# Altium PCB Calculator.PcbDoc
Units mm, origin at the board's own origin, x right, y up, seen from the top; angles counter-clockwise.
Board outline 115.32 x 59.44 mm, 2 copper layers (Top Layer, Bottom Layer); 53 components, 66 nets, 313 pads, 27 vias.
Unrouted connection lines stored in the file: 34.
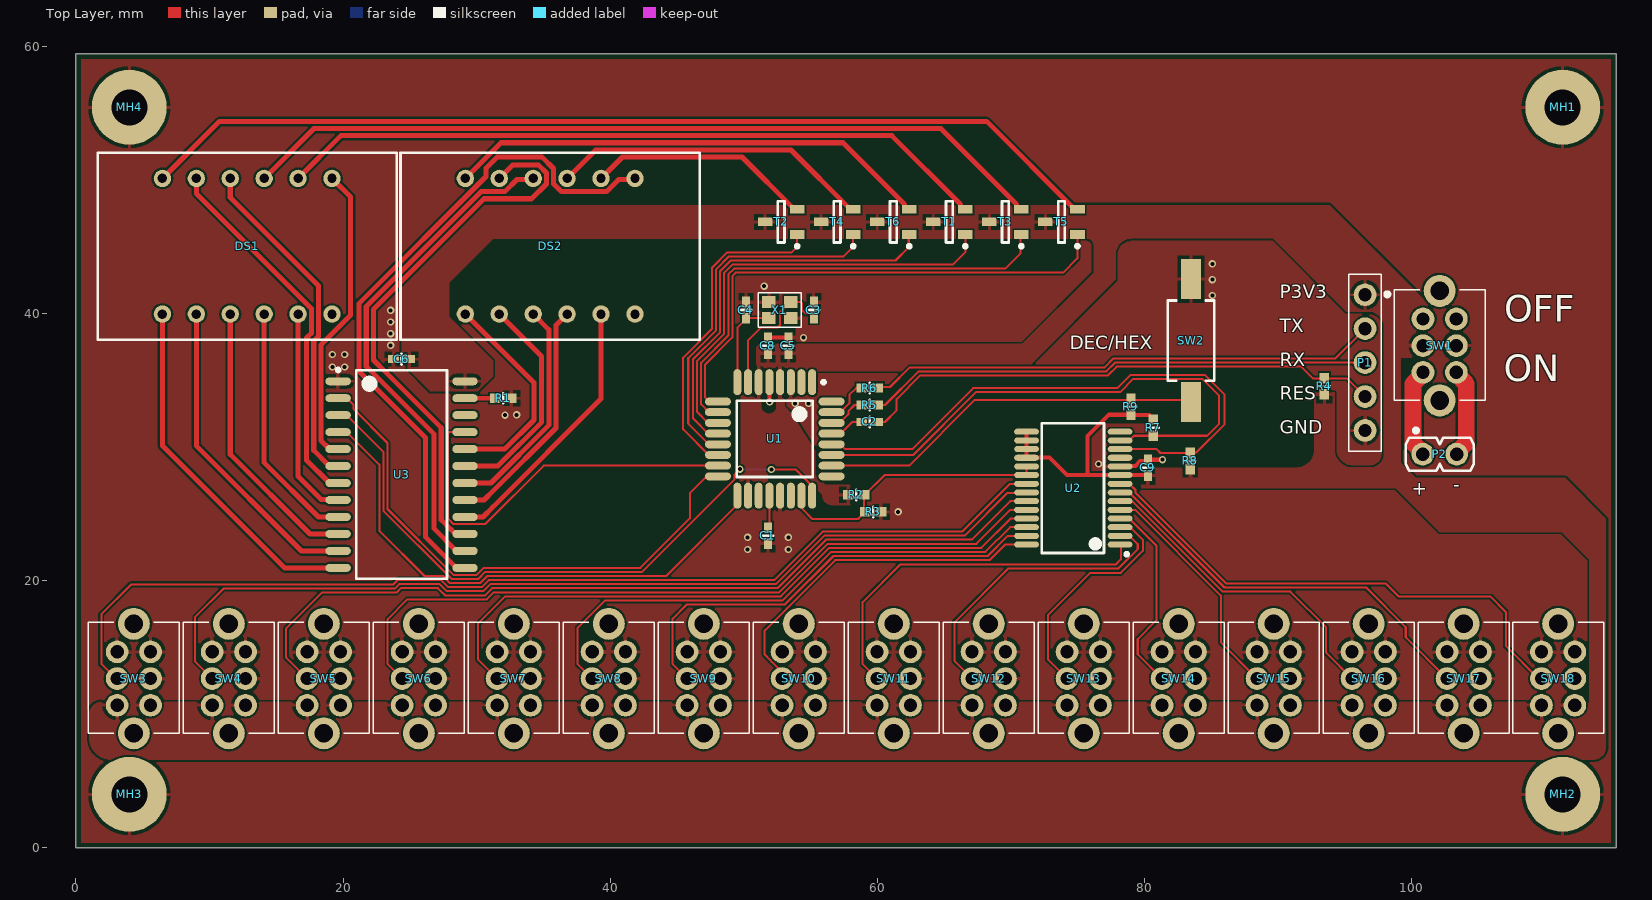
[diagram p0: Top Layer view]
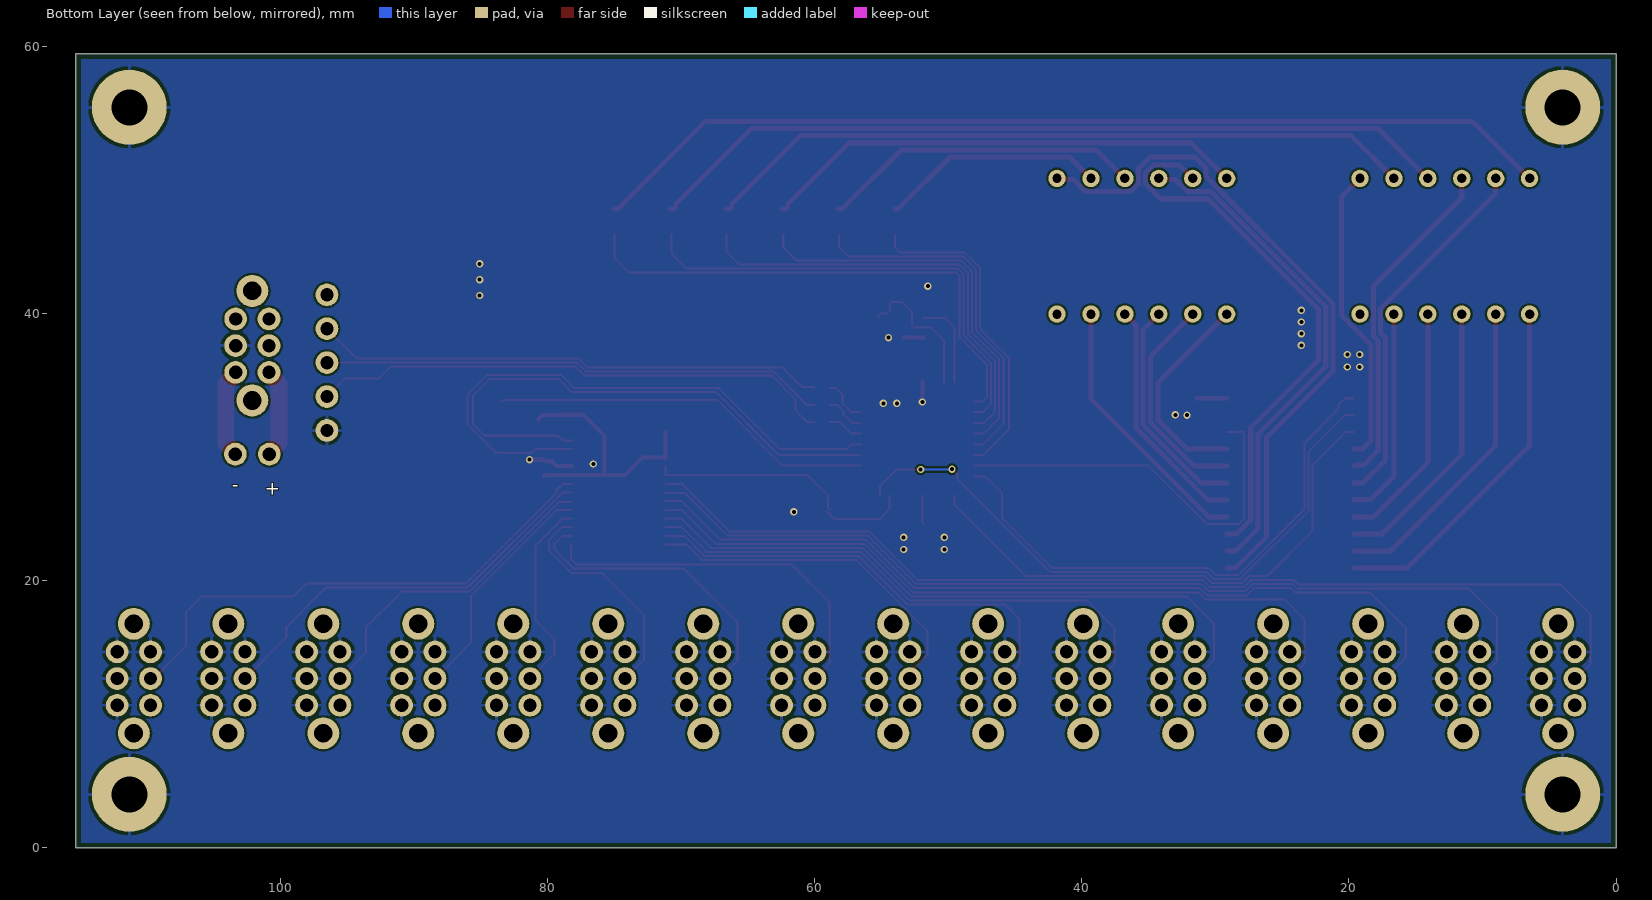
[diagram p1: Bottom Layer view, seen from below]
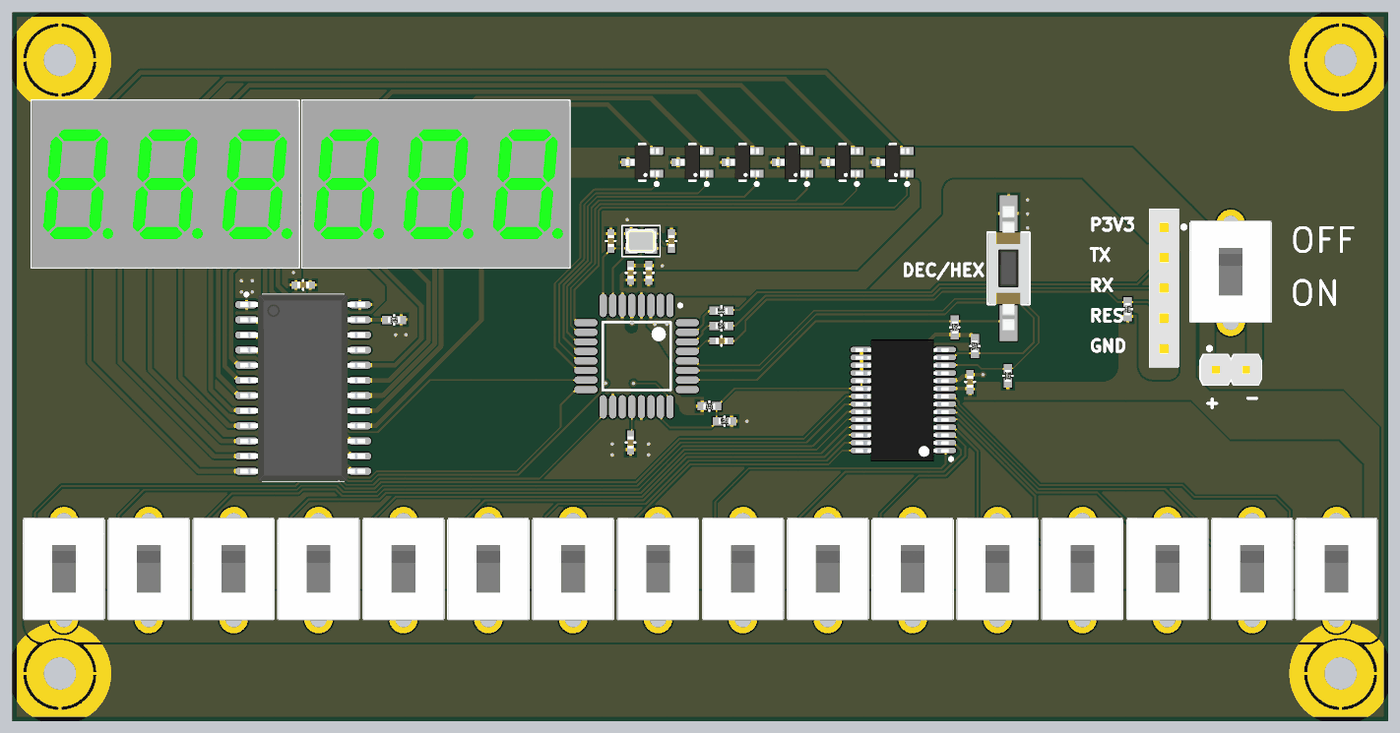
[diagram p2: 3D render of the assembled board from above, using the file's embedded part models]

## Layer stack, top to bottom
Top Solder: solder mask 0.0102, Solder Resist, Dk 3.5
Top Layer: signal copper 0.0356
Dielectric 1: dielectric 0.32, FR-4, Dk 4.8
Bottom Layer: signal copper 0.0356
Bottom Solder: solder mask 0.0102, Solder Resist, Dk 3.5

## Board outline
0,0 0,59.436 115.316,59.436 115.316,0

## Design rules (kind name [scope] priority, off if disabled: settings)
BoardOutlineClearance [All] p1: gap=0.381 ignorepadtopadclearanceinfootprint=FALSE
Clearance [All] p1: gap=0.152 ignorepadtopadclearanceinfootprint=FALSE except(0: Arc-Hole Track-Hole SMDPad-Hole THPad-Hole Via-Hole Fill-Hole Poly-Hole Region-Hole Text-Hole)
HoleSize [All] p1: absolutevalues=TRUE maxlimit=3.048 minlimit=0.025 maxpercent=80.000 minpercent=20.000
HoleToHoleClearance [All] p1: gap=0.254 allowstackedmicrovias=FALSE
MinimumSolderMaskSliver [All] p1: minsoldermaskwidth=0.152
PlaneConnect [All] p1: pad.planeconnectstyle=Relief pad.reliefexpansion=0.508 pad.reliefentries=4 pad.reliefconductorwidth=0.254 pad.reliefairgap=0.254 via.planeconnectstyle=Direct via.reliefexpansion=0.508 via.reliefentries=4 via.reliefconductorwidth=0.254 via.reliefairgap=0.254
PolygonConnect [All] p1: thpad.connectstyle=Relief thpad.reliefconductorwidth=0.254 thpad.reliefentries=4 thpad.polygonreliefangle="90 Angle" thpad.airgapwidth=0.254 smdpad.connectstyle=Relief smdpad.reliefconductorwidth=0.254 smdpad.reliefentries=4 smdpad.polygonreliefangle="90 Angle" smdpad.airgapwidth=0.254 via.connectstyle=Direct via.reliefconductorwidth=0.254 via.reliefentries=4 via.polygonreliefangle="90 Angle" via.airgapwidth=0.254
RoutingVias [All] p1: holewidth=0.3 width=0.55 viastyle="Through Hole" minholewidth=0.3 minwidth=0.55 maxholewidth=0.3 maxwidth=0.55
SilkToSilkClearance [All] p1: silktosilkclearance=0.102
SilkToSolderMaskClearance [IsPad] p1: minsilkscreentomaskgap=0.152 clearancetoexposedcopper=TRUE
SolderMaskExpansion [All] p1: expansion=0.102
UnRoutedNet [All] p1: checkbadconnections=TRUE
Width [All] p1: maxlimit=1.27 minlimit=0.152 preferedwidth=0.305 minimp=50.000000 maximp=50.000000 favimp=50.000000
23 further rules are at their usual default settings.

## Classes and differential pairs
component class uC: C1 C2 C3 C4 C5 C8 C9 R2 R3 R4 R5 R6 R7 R8 R9 U1 U2 X1
component class LEDs: C6 DS1 DS2 R1 T1 T2 T3 T4 T5 T6 U3
component class Connectors_and_mechanical: MH1 MH2 MH3 MH4 P1 P2 SW1 SW2 SW3 SW4 SW5 SW6 SW7 SW8 SW9 SW10 SW11 SW12 SW13 SW14 SW15 SW16 SW17 SW18

## Components (designator, comment, footprint, x,y, rotation, side; value= is the part's Value field where it differs from the comment)
C1 "100nF" CAPC0402X60N 51.816,23.368 r90 top
C2 "100nF" CAPC0402X60N 59.436,31.877 r0 top
C3 "12pF" CAPC0402X60N 55.245,40.259 r90 top
C4 "12pF" CAPC0402X60N 50.165,40.259 r270 top
C5 "100nF" CAPC0402X60N 53.34,37.592 r270 top
C6 "100nF" CAPC0402X60N 24.384,36.576 r0 top
C8 "100nF" CAPC0402X60N 51.816,37.592 r270 top
C9 "100nF" CAPC0402X60N 80.264,28.448 r270 top
DS1 "=Device" 7seg_3digits 6.477,39.954 r0 top locked
DS2 "=Device" 7seg_3digits 29.159,39.954 r0 top locked
MH1 "M2.5" MH-M2.5_COPPER 111.316,55.436 r0 top locked
MH2 "M2.5" MH-M2.5_COPPER 111.316,4 r0 top locked
MH3 "M2.5" MH-M2.5_COPPER 4,4 r0 top locked
MH4 "M2.5" MH-M2.5_COPPER 4,55.436 r0 top
P1 "SSW-105-02-G-S" SAMTEC_SSW-105-02-G-S 96.52,37.592 r270 top
P2 "MTLW-102-07-G-S-250" SAMTEC_MTLW-102-07-G-S-250 100.838,29.464 r0 top
R1 "3.48k" RESC0402X40N 32.004,33.655 r180 top
R2 "1k" RESC0402X40N 58.42,26.416 r180 top
R3 "1k" RESC0402X40N 59.69,25.146 r0 top
R4 "1k" RESC0402X40N 93.472,34.544 r270 top
R5 "1k" RESC0402X40N 59.436,33.147 r0 top
R6 "1k" RESC0402X40N 59.436,34.417 r0 top
R7 "1k" RESC0402X40N 80.67,31.445 r90 top
R8 "1k" RESC0402X40N 83.439,28.956 r270 top
R9 "1k" RESC0402X40N 78.994,33.02 r270 top
SW1 "SS008B" SS008B-02P-22 102.108,37.592 r0 top
SW2 "PTS636" PTS636_SMT_G 83.49,37.973 r270 top
SW3 "SS008B" SS008B-02P-22 4.338,12.668 r0 top
SW4 "SS008B" SS008B-02P-22 11.45,12.668 r0 top
SW5 "SS008B" SS008B-02P-22 18.562,12.668 r0 top
SW6 "SS008B" SS008B-02P-22 25.674,12.668 r0 top
SW7 "SS008B" SS008B-02P-22 32.786,12.668 r0 top
SW8 "SS008B" SS008B-02P-22 39.898,12.668 r0 top
SW9 "SS008B" SS008B-02P-22 47.01,12.668 r0 top
SW10 "SS008B" SS008B-02P-22 54.122,12.668 r0 top
SW11 "SS008B" SS008B-02P-22 61.234,12.668 r0 top
SW12 "SS008B" SS008B-02P-22 68.346,12.668 r0 top
SW13 "SS008B" SS008B-02P-22 75.458,12.668 r0 top
SW14 "SS008B" SS008B-02P-22 82.57,12.668 r0 top
SW15 "SS008B" SS008B-02P-22 89.682,12.668 r0 top
SW16 "SS008B" SS008B-02P-22 96.794,12.668 r0 top
SW17 "SS008B" SS008B-02P-22 103.906,12.668 r0 top
SW18 "SS008B" SS008B-02P-22 110.978,12.668 r0 top
T1 "BC847C" SOT23-3 65.393,46.863 r180 top
T2 "BC847C" SOT23-3 52.802,46.863 r180 top
T3 "BC847C" SOT23-3 69.59,46.863 r180 top
T4 "BC847C" SOT23-3 56.999,46.863 r180 top
T5 "BC847C" SOT23-3 73.787,46.863 r180 top
T6 "BC847C" SOT23-3 61.196,46.863 r180 top
U1 "ATmega328P-15AZ" 32MA_M 52.324,30.607 r270 top
U2 "MCP23017" SSOP28 74.676,26.924 r180 top
U3 "=Device" SOP-24_N 24.384,27.94 r0 top
X1 "16 MHz" LFXTAL069392CUTT 52.705,40.259 r180 top

## Footprints (in the part's own frame and the unit in brackets; to place one, negate y for a bottom-side part, rotate by r counter-clockwise, add the part's x,y. Pads: shape width x height; smd on the part's side, far side on the other; paste and mask are expansions set on the pad)
7seg_3digits [mm] "7seg 3 digits LED Display, 12 Pin Body 22.5x14mm"
  round 1.3 hole 0.7: 1(0,0) 2(2.54,0) 3(5.08,0) 4(7.62,0) 5(10.16,0) 6(12.7,0) 7(12.7,10.16) 8(10.16,10.16) 9(7.62,10.16) 10(5.08,10.16) 11(2.54,10.16) 12(0,10.16)
  silkscreen extent -4.85,-1.92 17.55,12.08, body extent -4.85,-1.92 17.55,12.08, height 7.1
32MA_M [mm] "Thin QFP, 32-Leads, Body 7x7mm, Pitch 0.8mm, IPC Low Density"
  oval 1.95x0.6 smd: 1(-4.25,2.8) 2(-4.25,2) 3(-4.25,1.2) 4(-4.25,0.4) 5(-4.25,-0.4) 6(-4.25,-1.2) 7(-4.25,-2) 8(-4.25,-2.8) 17(4.25,-2.8) 18(4.25,-2) 19(4.25,-1.2) 20(4.25,-0.4) 21(4.25,0.4) 22(4.25,1.2) 23(4.25,2) 24(4.25,2.8)
  oval 0.6x1.95 smd: 9(-2.8,-4.25) 10(-2,-4.25) 11(-1.2,-4.25) 12(-0.4,-4.25) 13(0.4,-4.25) 14(1.2,-4.25) 15(2,-4.25) 16(2.8,-4.25) 25(2.8,4.25) 26(2,4.25) 27(1.2,4.25) 28(0.4,4.25) 29(-0.4,4.25) 30(-1.2,4.25) 31(-2,4.25) 32(-2.8,4.25)
  silkscreen extent -4.37,-2.85 2.85,3.78, body extent -3.5,-3.5 3.5,3.5, height 1.2
CAPC0402X60N [mm] "Chip Capacitor, Body 1.0x0.5mm, IPC Medium Density"
  rect 0.8x0.6 smd: 1(-0.6,0) 2(0.6,0)
  silkscreen extent 0,-0.4 0,0.4, body extent -0.5,-0.25 0.5,0.25, height 0.6
LFXTAL069392CUTT [mm]
  rect 1x0.9 smd: 1(-0.825,-0.613) 2(0.825,-0.613) 3(0.825,0.613) 4(-0.825,0.613)
  silkscreen extent -1.6,-1.3 1.6,1.3, body extent -1.25,-1 1.25,1, height 0.8
MH-M2.5_COPPER [mm] "M2.5 screw Mounting Hole with copper without washer"
  round 5.6 hole 2.7 mask+1.5: MH(0,0)
PTS636_SMT_G [mm] "SMD TACT Switch, 2-Leads, Body 6x3.5mm, IPC Medium Density"
  rect 3x1.5 smd: 1(-4.6,0) 2(4.6,0)
  silkscreen extent -3,-1.75 3,1.75, body extent -5.2,-1.75 5.2,1.75, height 5
RESC0402X40N [mm] "Chip Resistor, Body 1.1x0.5mm, IPC Medium Density"
  rect 0.8x0.7 smd: 1(-0.6,0) 2(0.6,0)
  silkscreen extent 0,-0.38 0,0.38, body extent -0.5,-0.25 0.5,0.25, height 0.35
SAMTEC_MTLW-102-07-G-S-250 [mm] "4 Contacts - Pitch 2.54mm - Single Row Through Mount Straight Header (Post Lead = 6.35mm, Tail Lead 3.05mm, Insulator 1.52mm)"
  round 1.7 hole 1: 1(0,0) 2(2.54,0)
  silkscreen extent -1.27,-1.24 3.81,1.93, body extent -1.24,-1.24 3.84,1.24, height 7.87
SAMTEC_SSW-105-02-G-S [mm] "5 Contacts, Pitch 2.54mm - Top Entry, Single Row, Through Mount Straigh Socket"
  round 1.7 hole 1: 1(-3.81,0) 2(-1.27,0) 3(1.27,0) 4(3.81,0) 5(6.35,0)
  silkscreen extent -5.33,-1.21 7.9,1.82, body extent -5.33,-1.21 7.87,1.21, height 8.51
SOP-24_N [mm] "SOP, 24-Leads, Body 15,40x7,50mm, Pitch 1,27mm, IPC Medium Density"
  oval 1.9x0.6 smd: 1(-4.75,6.985) 2(-4.75,5.715) 3(-4.75,4.445) 4(-4.75,3.175) 5(-4.75,1.905) 6(-4.75,0.635) 7(-4.75,-0.635) 8(-4.75,-1.905) 9(-4.75,-3.175) 10(-4.75,-4.445) 11(-4.75,-5.715) 12(-4.75,-6.985) 13(4.75,-6.985) 14(4.75,-5.715) 15(4.75,-4.445) 16(4.75,-3.175) 17(4.75,-1.905) 18(4.75,-0.635) 19(4.75,0.635) 20(4.75,1.905) 21(4.75,3.175) 22(4.75,4.445) 23(4.75,5.715) 24(4.75,6.985)
  silkscreen extent -4.87,-7.8 3.4,7.96, body extent -5.27,-7.85 5.2,7.85, height 1.9
SOT23-3 [mm] "SOT, 3-Leads, Body 2.9x1.6mm, Pitch 0.95mm, IPC Medium Density"
  rect 1.1x0.65 smd: 1(-1.2,0.95) 2(-1.2,-0.95) 3(1.2,0)
  silkscreen extent -1.33,-1.55 0.25,1.95, body extent -1.4,-1.45 1.4,1.45, height 1.3
SS008B-02P-22 [mm] "2 position; DPDT; 0,3A/30VDC; ON-ON; 50m?"
  round 1.7 hole 1: 1(-1.25,-2) 2(-1.25,0) 3(-1.25,2) 4(1.25,-2) 5(1.25,0) 6(1.25,2)
  round 2.4 hole 1.4: ""(0,-4.1) ""(0,4.1)
  silkscreen extent -3.4,-4.1 3.4,4.2, body extent -3.4,-4.2 3.4,4.4, height 9
SSOP28 [mm] "SSOP, 28-Leads, Body 10.2x7.8mm, Pitch 0.65mm, IPC Medium Density"
  oval 1.85x0.45 smd: 1(-3.5,4.225) 2(-3.5,3.575) 3(-3.5,2.925) 4(-3.5,2.275) 5(-3.5,1.625) 6(-3.5,0.975) 7(-3.5,0.325) 8(-3.5,-0.325) 9(-3.5,-0.975) 10(-3.5,-1.625) 11(-3.5,-2.275) 12(-3.5,-2.925) 13(-3.5,-3.575) 14(-3.5,-4.225) 15(3.5,-4.225) 16(3.5,-3.575) 17(3.5,-2.925) 18(3.5,-2.275) 19(3.5,-1.625) 20(3.5,-0.975) 21(3.5,-0.325) 22(3.5,0.325) 23(3.5,0.975) 24(3.5,1.625) 25(3.5,2.275) 26(3.5,2.925) 27(3.5,3.575) 28(3.5,4.225)
  silkscreen extent -4.13,-4.85 2.35,5.07, body extent -3.81,-5.07 3.99,5.13, height 2.06

## Part data
C1 C2 C5 C6 C8 C9: library part CC0402_100NF_16V_10%_X7R, "Non-polarised capacitor", Case="0402 (1005 metric)", Dielectric=X7R, Manufacturer=GENERIC, Manufacturer 1 Component Height=0.5mm, Manufacturer 1 Example=Samsung, Manufacturer 1 Part Number=CL05B104KO5NNNC, Tolerance=10%, Voltage=16V, Author=KB, Create Date=29.07.2019, DesignItemId=CC0402_100NF_16V_10%_X7R, HelpURL=http://www.farnell.com/datasheets/1870456.pdf?_ga=2.66904750.1666480506.1564307475-778048469.1556931874&_gac=1.242951606.1563147047.EAIaIQobChMIrfuAvMi14wIVB-J3Ch1XegfpEAYYASABEgIMVfD_BwE, LatestRevisionDate=29.07.2019, Manufacturer Part Number=CC0402_100NF_16V_10%_X7R, Mounted=Yes, Part Description="Non-polarised capacitor", Pin Count=2, PressFit=No, Sense=No, SMD=Yes, Socket=No, Status=Recommended, Supplier 1=TME, Supplier 2=Farnell, Supplier 3=Mouser, Supplier Part Number 1=CL05B104KO5NNNC, Supplier Part Number 2=1758896, Supplier Part Number 3=710-885012205037
C3 C4: library part CC0402_12PF_50V_5%_C0G, "Non-polarised capacitor", Case="0402 (1005 metric)", Dielectric=C0G, Manufacturer=GENERIC, Manufacturer 1 Component Height=0.5mm, Manufacturer 1 Example=Murata, Manufacturer 1 Part Number=GRM1555C1H120JA01D, Tolerance=5%, Voltage=50V, Author=KB, Create Date=28.07.2019, DesignItemId=CC0402_12PF_50V_5%_C0G, HelpURL=https://search.murata.co.jp/Ceramy/image/img/A01X/G101/ENG/GJM1555C1H7R5CB01-01.pdf, LatestRevisionDate=28.07.2019, Manufacturer Part Number=CC0402_12PF_50V_5%_C0G, Mounted=Yes, Part Description="Non-polarised capacitor", Pin Count=2, PressFit=No, Sense=No, SMD=Yes, Socket=No, Status=Recommended, Supplier 1=TME, Supplier 2=Farnell, Supplier 3=Mouser, Supplier Part Number 1=GRM1555C1H120JA01D, Supplier Part Number 2=1758943, Supplier Part Number 3=81-GCM1555C1H120JA6J
DS1 DS2: library part "7-Segment Green Display CA 3-Digits", "7-seg LED Display; 9.14mm; 0.36”; 3 Digits; Green", Color=Green, Manufacturer=Generic, Manufacturer 1 Component Height=7.2mm, Manufacturer 1 Example=WENRUN, Manufacturer 1 Part Number=LTD036BAG-101A-02, Supplier Part Number 1=LTD036BAG-101A, Author=JK, Create Date=04.12.2019, DesignItemId="7-Segment Green Display CA 3-Digits", HelpURL=https://www.tme.eu/Document/a6075032405c075918ac13897b6973d4/LTD036BAG-101A.pdf, LatestRevisionDate=04.12.2019, Mounted=YES, Part Description="7-seg LED Display; 9.14mm; 0.36”; 3 Digits; Green", Pin Count=12, PressFit=No, Sense=No, SMD=No, Socket=No, Supplier 1=TME
MH1 MH2 MH3 MH4: library part MH-M2.5_C, "Mounting hole, M2.5, exposed pad", Author=KB, Create Date=19.05.2011, DesignItemId=MH-M2.5_C, Family=M2.5, LatestRevisionDate=19.05.2011, Part Description="Mounting hole, M2.5, exposed pad"
P1: library part HDR_THT_5X1V_F_2P54MM, "General Purpose Header: THT, 2.54mm, Female, Straight, Long Lead", Current Max=3A, Manufacturer=GENERIC, Manufacturer 1 Component Height=11.55mm, Manufacturer 1 Example=Samtec, Supplier Part Number 1=ZL262-5SG, Author=UN, Create Date=19.08.2014, DesignItemId=HDR_THT_5X1V_F_2P54MM, Family=SSW, HelpURL=https://pl.mouser.com/datasheet/2/527/ssw_th-1507658.pdf, LatestRevisionDate=19.08.2014, Manufacturer 1 Part Number=SSW-105-02-G-S, Manufacturer Part Number=HDR_THT_5X1V_F_2P54MM, Mounted=Yes, Part Description="General Purpose Header: THT, 2.54mm, Female, Straight, Long Lead", Pin Count=5, PressFit=No, Sense=No, SMD=No, Socket=No, Status=Recommended, Supplier 1=TME, Supplier 2=Mouser
P2: library part HDR_THT_2X1V_M_2P54MM, "General Purpose Header: THT, 2.54mm, Male, Straight", Current Max=5.2A, Manufacturer=GENERIC, Manufacturer 1 Component Height=10.92mm, Manufacturer 1 Example=Samtec, Supplier Part Number 1=200-MTLW10207GS250, Author=PC, Create Date=19.08.2013, DesignItemId=HDR_THT_2X1V_M_2P54MM, Family=MLTW, HelpURL=https://pl.mouser.com/datasheet/2/527/mtlw_th-1370324.pdf, LatestRevisionDate=19.08.2013, Manufacturer 1 Part Number=MTLW-102-07-G-S-250, Manufacturer Part Number=HDR_THT_2X1V_M_2P54MM, Mounted=Yes, Part Description="General Purpose Header: THT, 2.54mm, Male, Straight", Pin Count=2, PressFit=No, Sense=No, SMD=No, Socket=No, Status=Recommended, Supplier 1=Mouser, Supplier 2=Digi-Key, Supplier 3="Sager Electronics / Sager Electronics"
R1: library part R0402_3K48_0.0625W_100PPM, "General Purpose Thick Film Chip Resistor", Case="0402 (1005 metric)", Current Max=0, Manufacturer=GENERIC, Manufacturer 1 Component Height=0.4mm, Manufacturer 1 Example=Vishay, Manufacturer 1 Part Number=CRCW04023K48FKEDC, Manufacturer Part Number="R0402_3K48_0.0625W 0.1W 0.125W 0.25W 0.5W 1W 0.75W 1W_100PPM", Power=62.5mW, Tolerance=1%, Voltage=50V, Author=KB, Component Type=Standard, Create Date=03.07.2019, DesignItemId=R0402_3K48_0.0625W_100PPM, HelpURL=https://www.vishay.com/docs/20035/dcrcwe3.pdf, LatestRevisionDate=03.07.2019, Mounted=Yes, Part Description="General Purpose Thick Film Chip Resistor", Pin Count=2, PressFit=No, Sense=No, SMD=Yes, Socket=No, Status=Recommended, Supplier 1=Farnell, Supplier 2=TME, Supplier 3=Mouser, TC="±100 ppm/°C"
R2 R3 R4 R5 R6 R7 R8 R9: library part R0402_1K00_0.0625W_100PPM, "General Purpose Thick Film Chip Resistor", Case="0402 (1005 metric)", Current Max=0, Manufacturer=GENERIC, Manufacturer 1 Component Height=0.4mm, Manufacturer 1 Example=Vishay, Manufacturer 1 Part Number=CRCW04021K00FKEDC, Manufacturer Part Number="R0402_1K00_0.0625W 0.1W 0.125W 0.25W 0.5W 1W 0.75W 1W_100PPM", Power=62.5mW, Tolerance=1%, Voltage=50V, Author=KB, Component Type=Standard, Create Date=03.07.2019, DesignItemId=R0402_1K00_0.0625W_100PPM, HelpURL=https://www.vishay.com/docs/20035/dcrcwe3.pdf, LatestRevisionDate=03.07.2019, Mounted=Yes, Part Description="General Purpose Thick Film Chip Resistor", Pin Count=2, PressFit=No, Sense=No, SMD=Yes, Socket=No, Status=Recommended, Supplier 1=Farnell, Supplier 2=Mouser, Supplier 3=TME, Supplier Part Number 2=71-CRCW0402-1.0K-E3, Supplier Part Number 3=CRCW04021K00FKED, TC="±100 ppm/°C"
SW1 SW3 SW4 SW5 SW6 SW7 SW8 SW9 SW10 SW11 SW12 SW13 SW14 SW15 SW16 SW17 SW18: library part SS008B-02P-22, "Switch  2 position; DPDT; 0,3A/30VDC; ON-ON; 50mΩ", Manufacturer="CANAL ELECTRONIC", Manufacturer 1 Component Height=4.7mm, Supplier Part Number 1=SS008B02P22, Author=JK, Create Date=04.12.2019, DesignItemId=SS008B-02P-22, Family=SS008B, HelpURL=https://www.tme.eu/Document/b70a8664e2e58da8ce3209f25de299f1/ss008b02p22.pdf, LatestRevisionDate=04.12.2019, Manufacturer 1 Example="CANAL ELECTRONIC", Manufacturer 1 Part Number=SS008B-02P-22, Manufacturer Part Number=SS008B-02P-22, Mounted=Yes, Part Description="Switch  2 position; DPDT; 0,3A/30VDC; ON-ON; 50mΩ", Pin Count=6, PressFit=No, Sense=No, SMD=No, Socket=No, Status=Recommended, Supplier 1=TME
SW2: library part SMD_TACT_6P0X3P5MM, "Tactile Switches Tact 50mA 12VDC, 6.0x3.5, 4.3mm H, 180gf, G leads, No ground pin, Black Actuator", Manufacturer=C&K, Manufacturer 1 Component Height=4.3mm, Manufacturer 1 Example=S&K, Manufacturer 1 Part Number="PTS636 SM43 SMTR LFS", Supplier Part Number 1=611-PTS636SM43SMTRLF, Author=KB, Create Date=30.07.2019, DesignItemId=SMD_TACT_6P0X3P5MM, Family=PTS636, HelpURL=https://pl.mouser.com/datasheet/2/60/pts636-1550567.pdf, LatestRevisionDate=30.07.2019, Manufacturer Part Number="PTS636 SM43 SMTR LFS", Mounted=Yes, Part Description="Tactile Switches Tact 50mA 12VDC, 6.0x3.5, 4.3mm H, 180gf, G leads, No ground pin, Black Actuator", Pin Count=2, PressFit=No, Sense=No, SMD=Yes, Socket=No, Status=Recommended, Supplier 1=Mouser, Supplier 2=Digi-Key
T1 T2 T3 T4 T5 T6: "NPN Bipolar Transistor, 45V, 100mA, 250mW, SOT23", Manufacturer 1 Component Height=1.05mm, Manufacturer 1 Example=Nexperia, Manufacturer 1 Part Number=BC847C.215, Author=KB, Create Date=19.04.2009, DesignItemId=BC847C, Device=BC847C, HelpURL=https://assets.nexperia.com/documents/data-sheet/BC847_SER.pdf, LatestRevisionDate=19.04.2009, Mounted=Yes, Part Description="NPN Bipolar Transistor, 45V, 100mA, 250mW, SOT23", Pin Count=3, PressFit=No, Sense=No, SMD=Yes, Socket=No, Supplier 1=TME, Supplier 2=Farnell, Supplier 3=Mouser, Supplier Part Number 1=BC847C.215, Supplier Part Number 2=1081235, Supplier Part Number 3=771-BC847C-T/R
U1: library part CMP-0096-00111-2, "8-bit Automotive AVR Microcontroller, 32KB Flash, 1KB EEPROM, 2KB SRAM, 23 GPIO pins, Automotive Grade (-40°C to +125°C), 32-Pin TQFP", ComponentLink1Description="Manufacturer URL", ComponentLink1URL=http://www.atmel.com/, ComponentLink2Description="ATmega328P Datasheet", ComponentLink2URL=http://www.atmel.com/dyn/resources/prod_documents/doc7810.pdf, DatasheetVersion="revA, Nov-2009", PackageDescription="32-Lead Thin Profile Plastic Quad Flatpack (TQFP) - 7x7x1mm Body,  0.8 mm Pitch", PackageReference=32MA, PackageVersion="revB, Jul-2007", RevisionNote="URLs added"
U2: library part MCP23017-E/SS, "16-Bit I/O Expander with Serial Interface", Manufacturer 1 Component Height=1.75mm, Manufacturer 1 Example=Microchip, Supplier Part Number 1=579-MCP23017-E/SS, Author=JK, Create Date=06.09.2019, DesignItemId=MCP23017-E/SS, Device=MCP23017, HelpURL=https://www.tme.eu/Document/4a5fbc9d683fd19f7c43480a0c75c888/mcp23017.pdf, LatestRevisionDate=06.09.2019, Manufacturer 1 Part Number=MCP23017-E/SS, Mounted=Yes, Part Description="16-Bit I/O Expander with Serial Interface", Pin Count=28, PressFit=No, Sense=No, SMD=Yes, Socket=No, Supplier 1=Mouser, Supplier 2=Farnell, Supplier 3=TME, Supplier Part Number 2=1467674, Supplier Part Number 3=MCP23017-E/SS
U3: library part SCT2024, "Driver, kontroler LED, 5¡Å0mA, Kana³y: 16, 3¡Å,5V, SOP24", Manufacturer=Generic, Manufacturer 1 Component Height=2.65mm, Manufacturer 1 Example="STARCHIPS TECHNOLOGY", Manufacturer 1 Part Number=SCT2024CSOG, Author=UN, Create Date=14.08.2019, DesignItemId=SCT2024, HelpURL=https://www.tme.eu/Document/8876e3da3e0cc25d8b4c7cdeea8b8a88/SCT2024.pdf, LatestRevisionDate=14.08.2019, Mounted=Yes, Part Description="Driver, kontroler LED, 5¡Å0mA, Kana³y: 16, 3¡Å,5V, SOP24", Pin Count=24, PressFit=No, Sense=No, SMD=Yes, Socket=No, Supplier 1=TME, Supplier Part Number 1=SCT2024CSOG
X1: library part LFXTAL069392CUTT, "¡Å0ppm 10pF -40°C to +85°C  4 Pins, 2.5x2X0.6mm", Manufacturer 1 Component Height=0.6, Manufacturer 1 Example="IQD FREQUENCY PRODUCTS", Supplier Part Number 1=16.00M-CFPX-218, Author=PC, Create Date=19.08.2009, DesignItemId=LFXTAL069392CUTT, HelpURL=https://www.tme.eu/Document/39c21ac8c088601505d794405896ec92/LFXTAL069392Cutt.pdf, LatestRevisionDate=19.08.2009, Manufacturer 1 Part Number=LFXTAL069392CUTT, Mounted=Yes, Part Description="¡Å0ppm 10pF -40°C to +85°C  4 Pins, 2.5x2X0.6mm", Pin Count=4, PressFit=No, Sense=No, SMD=Yes, Socket=No, Supplier 1=TME, Supplier 2=Mouser, Supplier Part Number 2=449-LFXTAL069392CUTT

## Via types
v1: diameter 0.55, hole 0.3, Top Layer to Bottom Layer, tented both sides, 27 vias

## Nets (pads, with @x,y where several pads share a name; then routed paths per layer and width w, separated by ;. In a path a pad name is that pad's centre, name@x,y a point inside that pad or via, vN(x,y) a via of type N, cw(c..) or ccw(c..) an arc to the next point about the centre after c; other vN are vias at no path point)
A1: DS1.11 U3.7 | length 27.9
  Top Layer w0.381: DS1.11 9.017,48.978 17.63,40.365 17.63,38.512 17.274,38.156 17.274,29.015 18.984,27.305 U3.7
A2: DS2.11 U3.15 | length 41.9
  Top Layer w0.381: U3.15 28.425,23.495 28.102,23.817 28.091,23.817 27.356,24.553 27.356,31.445 23.241,35.56 22.276,36.525 22.276,40.31 30.554,48.588 34.117,48.588 35.232,49.703 35.232,50.525 34.65,51.107 32.692,51.107 DS2.11
B1: DS1.7 U3.5 | length 22.7
  Top Layer w0.381: DS1.7 20.574,48.717 20.574,39.878 18.341,37.645 18.341,30.488 18.984,29.845 U3.5
B2: DS2.7 U3.13 | length 51.2
  Top Layer w0.381: U3.13 28.484,20.955 26.162,23.277 26.162,30.709 21.209,35.662 21.209,40.76 30.706,50.257 30.706,50.874 31.537,51.704 34.91,51.704 35.76,50.854 35.76,50.6 35.765,50.595 35.765,49.706 36.35,49.121 39.73,49.121 40.638,50.029 41.773,50.029 DS2.7
C1: DS1.4 U3.9 | length 18.3
  Top Layer w0.381: DS1.4 14.097,28.829 18.161,24.765 U3.9
C2: DS2.4 U3.17 | length 17.9
  Top Layer w0.381: U3.17 30.557,26.035 31.294,26.772 35.941,31.419 35.941,39.116 DS2.4
CLK: U1.24 U3.3 | length 48.1
  Top Layer w0.152: U3.3 20.284,32.385 23.025,29.644 23.025,25.235 28.139,20.122 30.129,20.122 30.658,20.65 42.395,20.65 49.305,27.561 49.305,27.924 v1(49.724,28.342) ; v1(52.07,28.321) 53.887,28.321 55.124,27.084 U1.24
  Bottom Layer w0.152: v1(49.724,28.342) 49.702,28.321 v1(52.07,28.321)
D1: DS1.2 U3.11 | length 23.7
  Top Layer w0.381: DS1.2 9.017,30.099 16.891,22.225 U3.11
D2: DS2.2 U3.19 | length 16.5
  Top Layer w0.381: U3.19 31.588,28.575 34.874,31.861 34.874,36.779 DS2.2
DIGIT1: T5.1 U1.9 | length 39.2
  Top Layer w0.152: U1.9 47.43,33.407 47.117,33.72 47.117,36.18 49.149,38.212 49.149,42.799 49.403,43.053 73.914,43.053 74.987,44.126 T5.1
DIGIT2: T3.1 U1.10 | length 36.1
  Top Layer w0.152: U1.10 47.399,32.607 46.812,33.194 46.812,36.321 48.844,38.353 48.844,42.925 49.277,43.358 69.596,43.358 70.739,44.501 70.739,45.862 T3.1
DIGIT3: T1.1 U1.11 | length 33.2
  Top Layer w0.152: U1.11 47.323,31.807 46.507,32.622 46.507,36.447 48.539,38.48 48.539,43.052 49.151,43.663 65.659,43.663 66.593,44.597 T1.1
DIGIT4: T6.1 U1.12 | length 30
  Top Layer w0.152: U1.12 47.352,31.007 46.203,32.156 46.203,36.574 48.235,38.606 48.235,43.178 49.024,43.967 61.366,43.967 62.357,44.958 62.357,45.874 T6.1
DIGIT5: T4.1 U1.13 | length 27.2
  Top Layer w0.152: U1.13 47.39,30.207 45.847,31.75 45.847,36.649 47.93,38.732 47.93,43.304 48.898,44.272 57.48,44.272 58.199,44.991 T4.1
DIGIT6: T2.1 U1.14 | length 24.3
  Top Layer w0.152: U1.14 47.392,29.407 45.466,31.333 45.466,36.699 47.625,38.858 47.625,43.43 48.772,44.577 53.594,44.577 54.002,44.985 T2.1
DP1: DS1.3 U3.10 | length 21
  Top Layer w0.381: DS1.3 11.557,29.464 17.526,23.495 U3.10
DP2: DS2.3 U3.18 | length 16.9
  Top Layer w0.381: U3.18 31.073,27.305 35.408,31.64 35.408,38.786 DS2.3
E1: DS1.1 U3.12 | length 26.8
  Top Layer w0.381: DS1.1 6.477,30.099 15.621,20.955 U3.12
E2: DS2.1 U3.20 | length 16.1
  Top Layer w0.381: U3.20 32.104,29.845 34.29,32.031 34.29,34.823 DS2.1
F1: DS1.10 U3.6 | length 25.6
  Top Layer w0.381: DS1.10 11.557,48.687 18.163,42.081 18.163,38.291 17.808,37.935 17.808,29.751 18.912,28.647 19.562,28.647 U3.6
F2: DS2.10 U3.14 | length 38.2
  Top Layer w0.381: U3.14 28.484,22.225 26.797,23.912 26.797,30.988 21.742,36.043 21.742,40.531 30.333,49.121 32.11,49.121 33.018,50.029 34.153,50.029 DS2.10
G1: DS1.5 U3.8 | length 15.9
  Top Layer w0.381: DS1.5 16.637,27.813 18.373,26.077 19.592,26.077 U3.8
G2: DS2.5 U3.16 | length 20.2
  Top Layer w0.381: U3.16 30.472,24.765 31.209,25.502 39.319,33.612 DS2.5
GND: C1.1 C3.2 C4.1 C5.1 C6.1 C8.1 C9.1 MH1.MH MH2.MH MH3.MH MH4.MH P1.5 R1.1 R3.2 SW1.5 SW2.1 SW3.3 SW3.4 SW3.5 SW3.6 SW4.3 SW4.4 SW4.5 SW4.6 SW5.3 SW5.4 SW5.5 SW5.6 SW6.3 SW6.4 SW6.5 SW6.6 SW7.3 SW7.4 SW7.5 SW7.6 SW8.3 SW8.4 SW8.5 SW8.6 SW9.3 SW9.4 SW9.5 SW9.6 SW10.3 SW10.4 SW10.5 SW10.6 SW11.3 SW11.4 SW11.5 SW11.6 SW12.3 SW12.4 SW12.5 SW12.6 SW13.3 SW13.4 SW13.5 SW13.6 SW14.3 SW14.4 SW14.5 SW14.6 SW15.3 SW15.4 SW15.5 SW15.6 SW16.3 SW16.4 SW16.5 SW16.6 SW17.3 SW17.4 SW17.5 SW17.6 SW18.3 SW18.4 SW18.5 SW18.6 U1.3 U1.5 U1.21 U2.10 U3.1 X1.2 X1.4 | length 6.4
  Top Layer w0.305: C8.1 C5.1 ; U1.5 51.924,33.395 ccw(c51.943,33.395) v1(51.943,33.376) ; U2.10 78.204,28.577 79.326,28.577 79.685,28.936 80.152,28.936 80.266,29.05 81.354,29.05 v1(81.356,29.052)
  other v1: 50.292,22.327 53.34,22.327 50.292,23.241 53.34,23.241 61.57,25.146 76.581,28.727 32.131,32.385 32.995,32.41 53.848,33.274 54.864,33.274 19.202,35.992 20.117,35.992 19.202,36.932 20.117,36.932 23.571,37.617 54.48,38.188 23.571,38.489 23.571,39.362 23.571,40.234 85.09,41.351 51.534,42.049 85.09,42.532 85.09,43.713
INT: R2.1 R3.1 U1.23 U2.19 U2.20 | length 20.8
  Top Layer w0.152: U1.23 54.41,26.271 54.41,25.346 55.143,24.613 58.557,24.613 58.766,24.822 58.766,24.872 59.04,25.146 R3.1 ; R3.1@58.857,25.329 59.02,25.492 R2.1 ; R2.1@59.055,26.416 60.538,27.899 U2.20 U2.19
LA: U1.17 U3.4 | length 40.6
  Top Layer w0.152: U3.4 20.284,31.115 22.72,28.679 22.72,23.727 26.102,20.345 27.484,20.345 28.013,19.817 30.255,19.817 30.784,20.345 44.187,20.345 49.524,25.682 U1.17
NetC1_2: C1.2 U1.20 | length 2.2
  Top Layer w0.152: C1.2@51.816,24.222 51.924,24.33 U1.20
NetC2_1: C2.1 U1.29 | length 2.6
  Top Layer w0.152: U1.29 57.249,31.007 58.119,31.877 C2.1
NetC3_1: C3.1 U1.7 X1.1 | length 10.7
  Top Layer w0.152: U1.7 50.324,37.984 51.308,38.968 52.557,38.968 52.705,39.116 52.705,40.097 53.48,40.872 X1.1 54.251,40.872 54.356,40.767 54.356,40.259 54.632,39.983 55.021,39.983 55.245,39.759 C3.1
NetC4_2: C4.2 U1.8 X1.3 | length 6.8
  Top Layer w0.152: U1.8 49.524,38.918 50.165,39.559 C4.2 50.177,39.646 X1.3
NetDS1_8: DS1.8 T1.2 | length 53.7
  Top Layer w0.381: DS1.8 19.837,53.315 61.091,53.315 66.233,48.172 66.233,47.947 66.368,47.813 T1.2
NetDS1_9: DS1.9 T3.2 | length 60.9
  Top Layer w0.381: DS1.9 17.831,53.848 64.755,53.848 70.43,48.172 70.43,47.947 70.565,47.813 T3.2
NetDS1_12: DS1.12 T5.2 | length 73
  Top Layer w0.381: DS1.12 10.748,54.385 68.19,54.385 74.762,47.813 T5.2
NetDS2_8: DS2.8 T2.2 | length 17
  Top Layer w0.381: DS2.8 40.919,51.714 49.876,51.714 53.777,47.813 T2.2
NetDS2_9: DS2.9 T4.2 | length 24.1
  Top Layer w0.381: DS2.9 38.913,52.248 53.539,52.248 57.974,47.813 T4.2
NetDS2_12: DS2.12 T6.2 | length 36.5
  Top Layer w0.381: DS2.12 31.826,52.781 57.428,52.781 62.037,48.172 62.037,47.947 62.171,47.813 T6.2
NetP2_1: P2.1 SW1.1 | length 6.7
  Top Layer w1.27: P2.1 100.838,29.58 100.121,30.298 100.121,34.738 100.858,35.476 SW1.1
NetP2_2: P2.2 SW1.4 | length 6.7
  Top Layer w1.27: SW1.4 103.358,35.476 104.095,34.738 104.095,30.298 103.378,29.58 P2.2
NetR1_2: R1.2 U3.23 | length 2.3
  Top Layer w0.305: U3.23 R1.2
NetR5_1: R5.1 U1.30 | length 3
  Top Layer w0.152: U1.30 57.197,31.807 57.831,32.441 57.831,32.685 58.293,33.147 R5.1
NetR6_1: R6.1 U1.31 | length 3.4
  Top Layer w0.152: U1.31 57.249,32.607 57.912,33.27 57.912,33.909 58.42,34.417 R6.1
OE: U1.15 U3.21 | length 29.9
  Top Layer w0.152: U3.21 27.953,31.115 27.864,31.026 27.864,24.638 28.265,24.236 30.65,24.236 35.021,28.607 U1.15
P3V3: C5.2 C6.2 C8.2 C9.2 P1.1 R2.2 R4.2 R7.2 R8.2 R9.2 SW1.2 SW3.1 SW4.1 SW5.1 SW6.1 SW7.1 SW8.1 SW9.1 SW10.1 SW11.1 SW12.1 SW13.1 SW14.1 SW15.1 SW16.1 SW17.1 SW18.1 T1.3 T2.3 T3.3 T4.3 T5.3 T6.3 U1.4 U1.6 U1.18 U2.9 U2.15 U2.16 U2.17 U2.18 U3.24 | length 20.4
  Top Layer w0.305: U2.15 U2.16 U2.17 U2.18 71.187,29.21 72.898,29.21 74.209,27.899 75.743,27.899 ; C9.2 ccw(c80.213,27.848) 80.213,27.899 U2.9 75.743,27.899 ; R7.2 80.67,32.095 80.381,32.385 79.029,32.385 R9.2 77.353,32.42 75.743,30.81 75.743,27.899
  Top Layer w1.27: P1.1@96.52,41.286 P1.1
RESET: C2.2 P1.4 R4.1 | length 39.6
  Top Layer w0.152: C2.2 60.579,31.877 61.451,32.749 61.451,33.587 63.225,35.362 77.272,35.362 77.927,36.017 91.745,36.017 92.618,35.144 95.158,35.144 P1.4
RX: P1.3 R5.2 | length 37.8
  Top Layer w0.152: R5.2 60.579,33.147 63.099,35.667 77.146,35.667 77.801,36.322 P1.3
SCL: R8.1 U1.28 U2.12 | length 43.6
  Top Layer w0.152: U1.28 57.229,30.207 57.591,29.845 62.611,29.845 67.183,34.417 77.978,34.417 78.967,35.406 84.507,35.406 86.004,33.909 86.004,31.699 83.896,29.591 83.474,29.591 R8.1 81.207,29.556 80.914,29.849 U2.12
SDA: R7.1 U1.27 U2.13 | length 41.9
  Top Layer w0.152: U1.27 62.681,29.407 67.386,34.112 78.181,34.112 79.171,35.102 84.334,35.102 85.598,33.838 85.598,31.75 84.693,30.845 R7.1 79.222,30.845 78.876,30.499 U2.13
SDI: U1.16 U3.2 | length 41.2
  Top Layer w0.152: U3.2 20.284,33.655 20.79,33.149 20.79,32.846 23.33,30.306 23.33,25.362 28.265,20.426 30.003,20.426 30.532,20.955 42.268,20.955 45.974,24.661 45.974,26.543 47.097,27.666 47.137,27.666 47.278,27.807 U1.16
SW0: SW11.2 U2.1 | length 28
  Top Layer w0.152: SW11.2 58.905,13.747 58.905,18.392 61.722,21.209 77.851,21.209 78.232,21.59 78.232,22.643 U2.1
SW1: SW12.2 U2.2 | length 22.7
  Top Layer w0.152: SW12.2 65.786,13.978 65.786,16.891 69.799,20.904 78.054,20.904 79.502,22.352 79.502,22.723 78.876,23.349 U2.2
SW2: SW13.2 U2.3 | length 17.4
  Top Layer w0.152: SW13.2 72.771,14.105 72.771,17.399 75.946,20.574 78.232,20.574 79.883,22.225 79.883,23.046 78.93,23.999 U2.3
SW3: SW14.2 U2.4 | length 14.9
  Top Layer w0.152: U2.4 78.876,24.649 80.899,22.626 80.899,17.018 79.502,15.621 79.502,14.486 SW14.2
SW4: SW15.2 U2.5 | length 17.5
  Top Layer w0.152: U2.5 79.299,25.299 85.725,18.873 85.725,15.375 SW15.2
SW5: SW16.2 U2.6 | length 24
  Top Layer w0.152: U2.6 78.233,25.892 79.137,25.892 85.852,19.177 90.932,19.177 93.599,16.51 93.599,14.613 SW16.2
SW6: SW17.2 U2.7 | length 30.7
  Top Layer w0.152: U2.7 78.876,26.599 85.993,19.482 96.596,19.482 99.567,16.511 99.567,15.757 SW17.2
SW7: SW18.2 U2.8 | length 39.2
  Top Layer w0.152: U2.8 78.867,27.249 79.33,26.787 79.33,26.576 86.119,19.787 98.069,19.787 99.06,18.796 105.918,18.796 107.061,17.653 107.061,15.113 109.506,12.668 SW18.2
SW8: SW3.2 U2.21 | length 79.1
  Top Layer w0.152: SW3.2 3.004,12.668 1.905,13.767 1.905,17.475 4.14,19.71 23.751,19.71 24.081,20.041 27.358,20.041 27.886,19.512 30.382,19.512 30.91,20.041 52.276,20.041 55.908,23.673 66.345,23.673 69.901,27.229 71.156,27.229 U2.21
SW9: SW4.2 U2.22 | length 71.7
  Top Layer w0.152: SW4.2 8.934,13.934 8.934,17.291 11.049,19.406 23.877,19.406 24.207,19.736 27.231,19.736 27.76,19.207 30.508,19.207 31.037,19.736 52.402,19.736 56.035,23.368 66.554,23.368 69.745,26.559 71.136,26.559 U2.22
SW10: SW5.2 U2.23 | length 64.2
  Top Layer w0.152: SW5.2 15.723,14.257 15.723,16.408 18.415,19.101 24.003,19.101 24.333,19.431 27.105,19.431 27.634,18.902 30.634,18.902 31.163,19.431 52.529,19.431 56.161,23.063 67.071,23.063 69.957,25.949 U2.23
SW11: SW6.2 U2.24 | length 56.1
  Top Layer w0.152: SW6.2 23.345,13.747 23.345,17.122 24.821,18.598 30.76,18.598 31.289,19.126 52.655,19.126 56.287,22.758 67.412,22.758 69.952,25.298 U2.24
SW12: SW7.2 U2.25 | length 49
  Top Layer w0.152: SW7.2 30.099,14.105 30.099,16.764 32.156,18.821 52.781,18.821 56.413,22.454 67.788,22.454 69.983,24.649 U2.25
SW13: SW8.2 U2.26 | length 41
  Top Layer w0.152: SW8.2 37.569,13.747 37.569,16.46 39.626,18.517 52.908,18.517 56.54,22.149 68.097,22.149 69.948,23.999 U2.26
SW14: SW9.2 U2.27 | length 34
  Top Layer w0.152: SW9.2 44.681,13.747 44.681,17.16 45.733,18.212 53.087,18.212 56.719,21.844 68.276,21.844 69.781,23.349 U2.27
SW15: SW10.2 U2.28 | length 26.4
  Top Layer w0.152: SW10.2 52.872,13.098 ccw(c52.72,13.098) 52.827,13.206 52.245,13.788 ccw(c52.137,13.681) 52.228,13.803 cw(c52.872,14.668) 52.007,14.024 ccw(c51.885,13.933) 51.992,14.041 51.601,14.432 cw(c51.709,14.539) 51.557,14.539 51.557,16.188 cw(c51.709,16.188) 51.601,16.295 53.213,17.907 56.845,21.539 68.402,21.539 69.562,22.699 U2.28
SWITCH: R9.1 SW2.2 U1.26 | length 29.1
  Top Layer w0.152: U1.26 62.389,28.607 67.31,33.528 78.902,33.528 R9.1 79.086,33.528 83.335,33.528 SW2.2
TX: P1.2 R6.2 | length 38.3
  Top Layer w0.152: R6.2 60.112,34.493 60.951,34.493 62.43,35.972 77.019,35.972 77.675,36.627 94.285,36.627 P1.2
pads on no net: DS1.6 DS2.6 SW1. SW1.3 SW1.6 SW3. SW4. SW5. SW6. SW7. SW8. SW9. SW10. SW11. SW12. SW13. SW14. SW15. SW16. SW17. SW18. U1.1 U1.2 U1.19 U1.22 U1.25 U1.32 U2.11 U2.14 U3.22

## Polygon pours and split planes (outlines as drawn)
GND on Top Layer "GND_L01_P022" (solid, remove dead copper, pour order 22): 0,0 0,59.436 115.316,59.436 115.316,0
P3V3 on Top Layer "Top Layer-P3V3" (solid, pour order 21): 1.016,8.187 ccw(c2.599,8.187) 2.599,6.604 113.636,6.604 ccw(c113.636,7.522) 114.554,7.522 114.554,24.638 111.506,27.686 100.33,27.686 99.187,28.829 99.187,36.703 101.981,36.703 102.235,36.957 102.235,39.751 93.878,48.108 30.074,48.108 24.384,42.418 24.384,36.322 26.543,34.163 30.099,34.163 31.242,35.306 31.242,36.449 27.94,39.751 27.94,42.291 31.242,45.593 75.689,45.593 cw(c75.689,45.082) 76.2,45.082 76.2,43.053 70.866,37.719 51.181,37.719 50.927,37.465 50.927,35.687 70.993,35.687 77.851,42.545 77.851,44.425 cw(c79.019,44.425) 79.019,45.593 89.662,45.593 95.123,40.132 96.799,40.132 cw(c96.787,39.002) 97.917,39.002 cw(c96.93,39.001) 97.917,38.989 97.917,29.466 cw(c96.926,29.466) 96.926,28.475 95.58,28.473 cw(c95.58,29.819) 94.234,29.819 94.234,34.087 92.71,34.087 92.71,29.794 cw(c91.608,29.783) 92.71,29.781 cw(c91.395,29.781) 91.408,28.466 91.338,28.466 79.756,28.448 79.756,26.924 98.806,26.924 102.108,23.622 111.252,23.622 113.302,21.572 113.302,10.922 1.912,10.922 ccw(c1.912,10.026) 1.016,10.026 1.016,8.763
P3V3 on Top Layer "Top Layer-P3V3 1" (solid, pour order 7): 58.166,26.772 58.166,26.974 ccw(c57.963,26.975) 57.963,27.178 56.134,27.178 55.372,27.94 55.372,29.718 53.589,32.512 53.061,33.04 53.061,34.366 52.451,34.366 52.426,34.341 52.449,34.318 52.449,33.02 cw(c51.929,33.031) 51.918,32.512 51.878,32.512 cw(c51.878,33.082) 51.308,33.082 51.308,34.544 49.784,34.544 49.784,27.686 49.53,27.432 49.53,25.4 51.816,25.4 51.816,28.488 53.808,28.488 55.88,26.416 55.88,26.391 ccw(c56.617,26.391) 56.617,25.654 57.963,25.654 ccw(c57.963,25.857) 58.166,25.857
GND on Bottom Layer "GND_L02_P001" (solid, pour order 1): 0,0 0,59.436 115.316,59.436 115.316,0

## Silkscreen, mask and mechanical layers (free items; w line width, h text height)
Top Overlay:
  text "P3V3" at 90.145,41.148 h1
  text "OFF" at 106.934,39.37 h2
  text "TX" at 90.145,38.608 h1
  text "DEC/HEX" at 74.422,37.338 h1
  text "RX" at 90.145,36.068 h1
  text "ON" at 106.909,34.925 h2
  text "RES" at 90.145,33.528 h1
  text "GND" at 90.145,30.988 h1
  text "+" at 100.163,27.432 h1 r270
  text "-" at 103.124,26.678 h1
Bottom Overlay:
  text "+" at 100.163,27.432 h1 r270
  text "-" at 103.124,26.678 h1
PCB Outline:
  the board outline again, w0.2